# Altium PCB SIM7600_M_V2.1.1.PcbDoc
Units mm, origin at the board's own origin, x right, y up, seen from the top; angles counter-clockwise.
Board outline 149.61 x 116.74 mm, 4 copper layers (Top Layer, GND, PWR, Bottom Layer); 109 components, 93 nets, 423 pads, 113 vias.
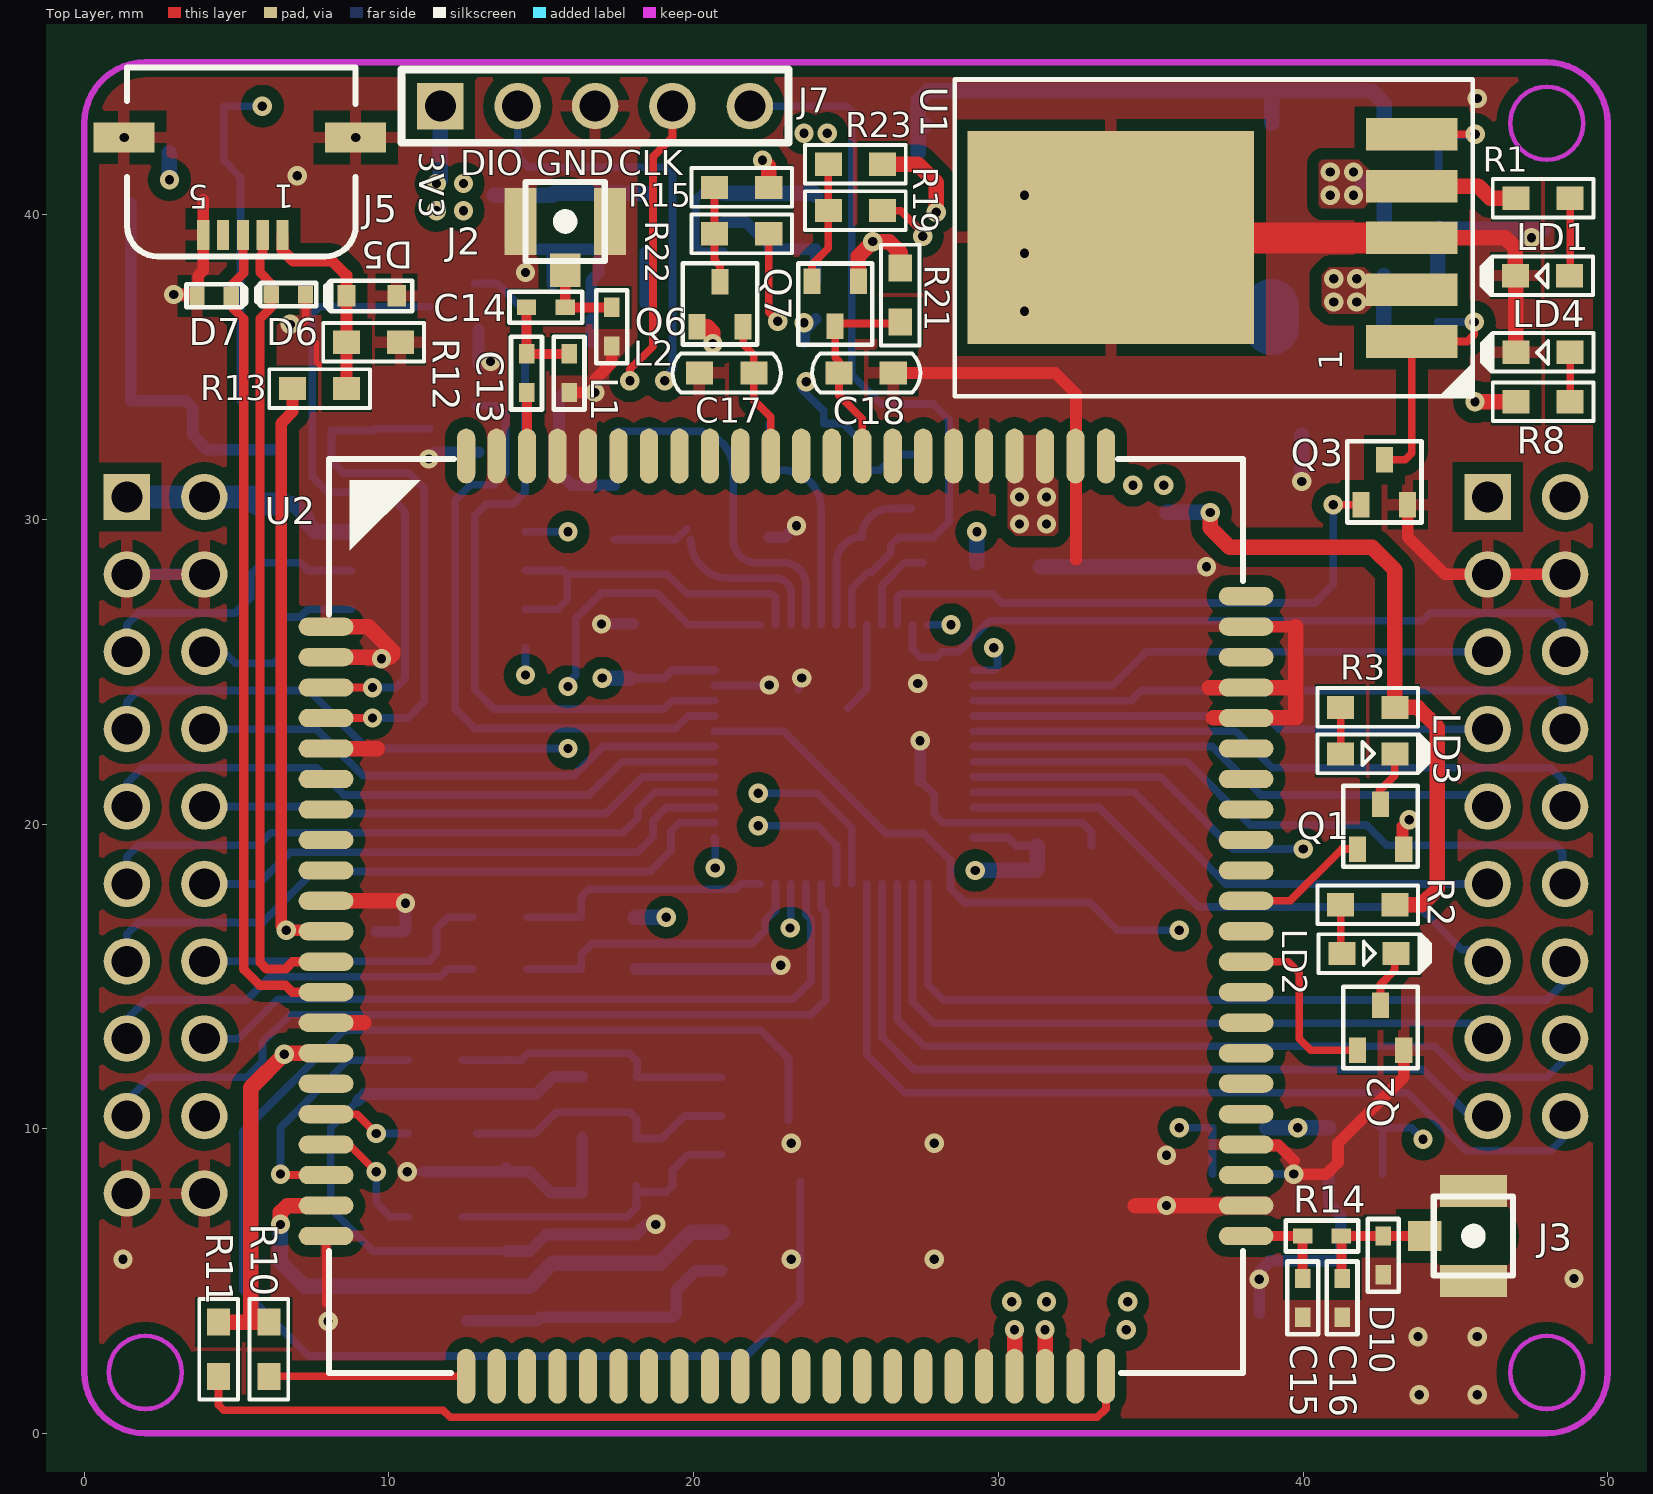
[diagram p0: Top Layer view]
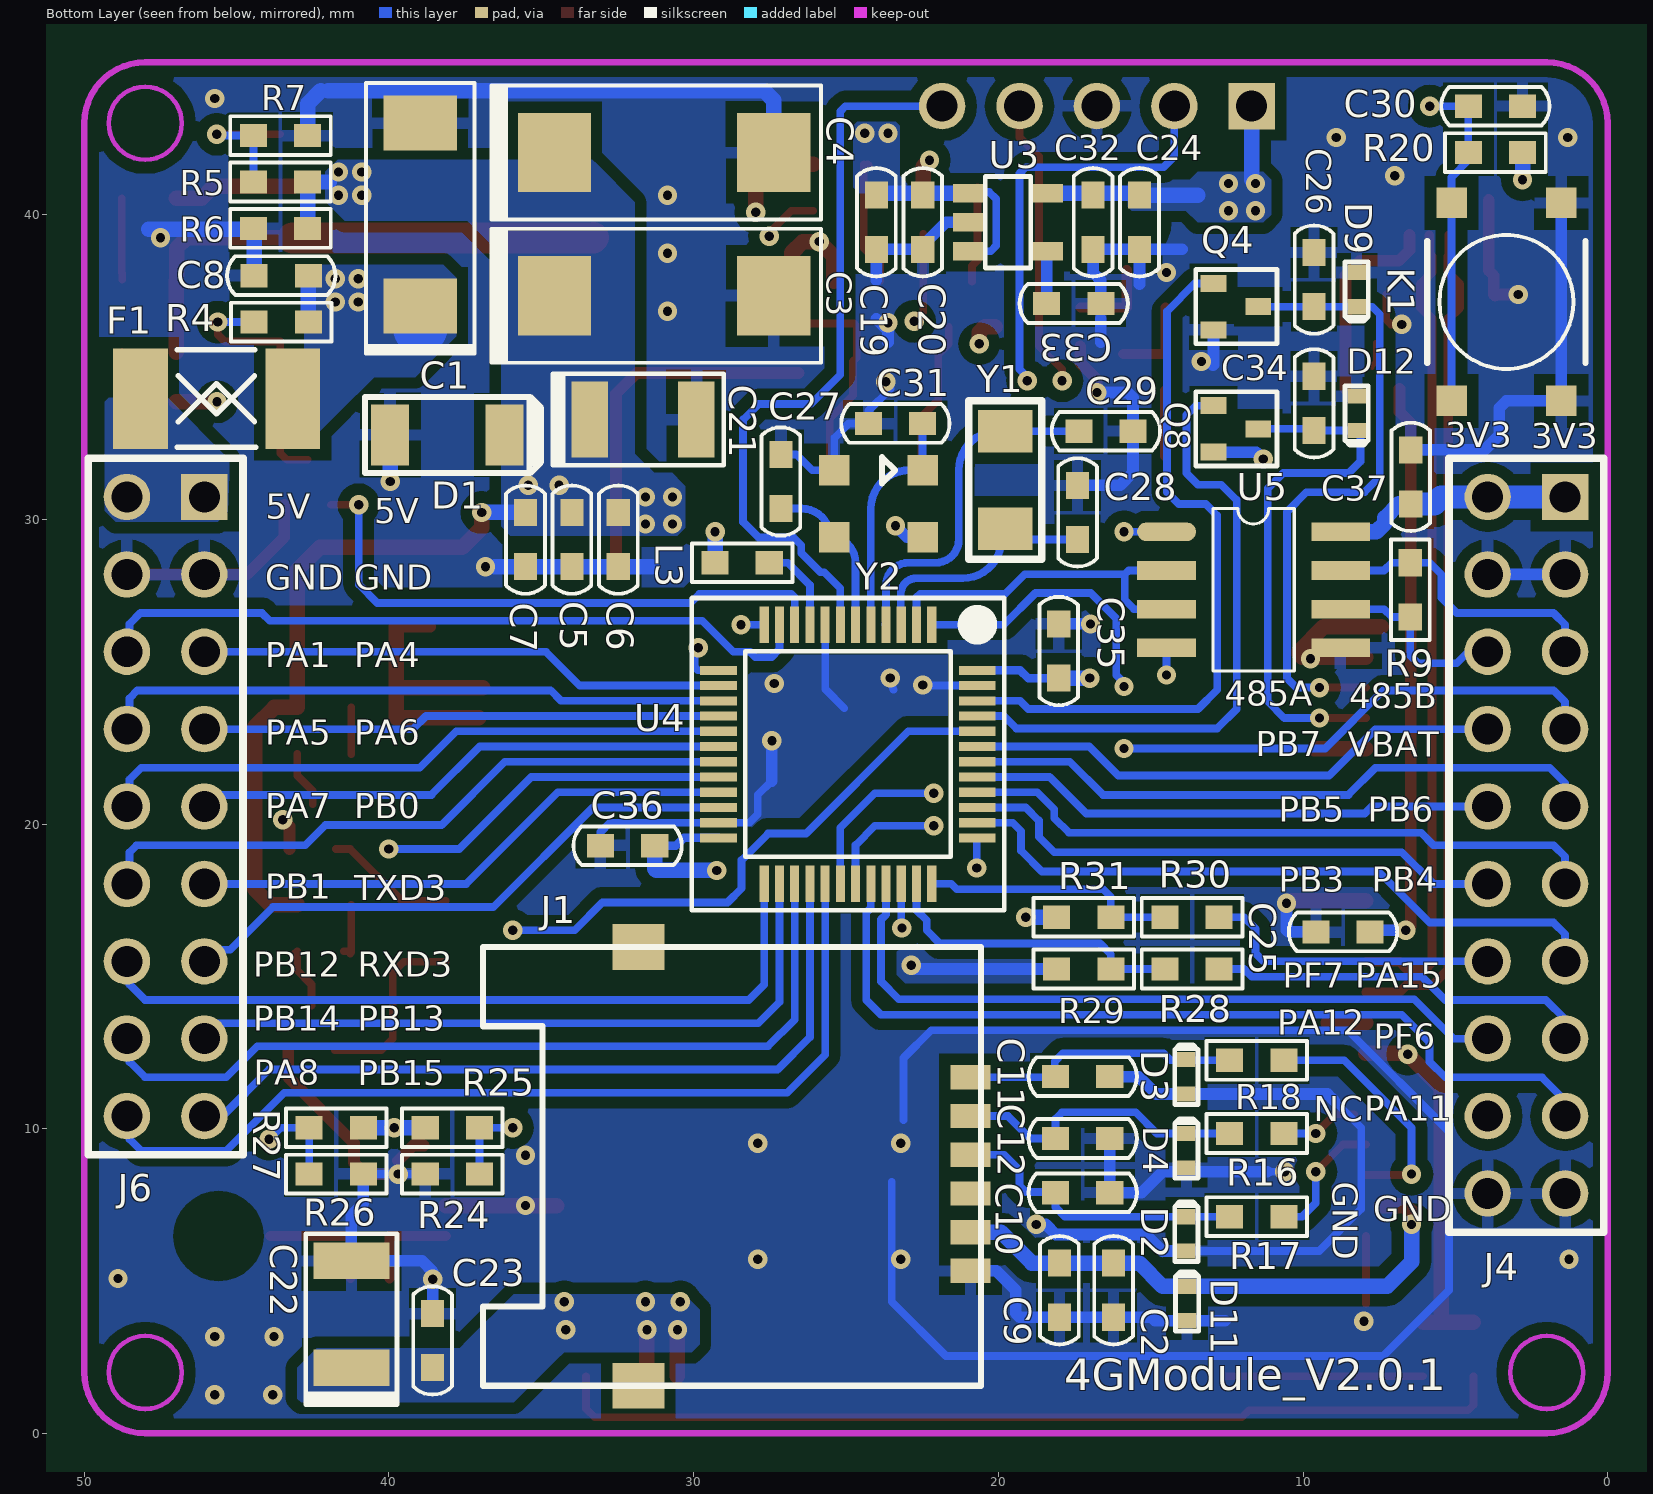
[diagram p1: Bottom Layer view, seen from below]
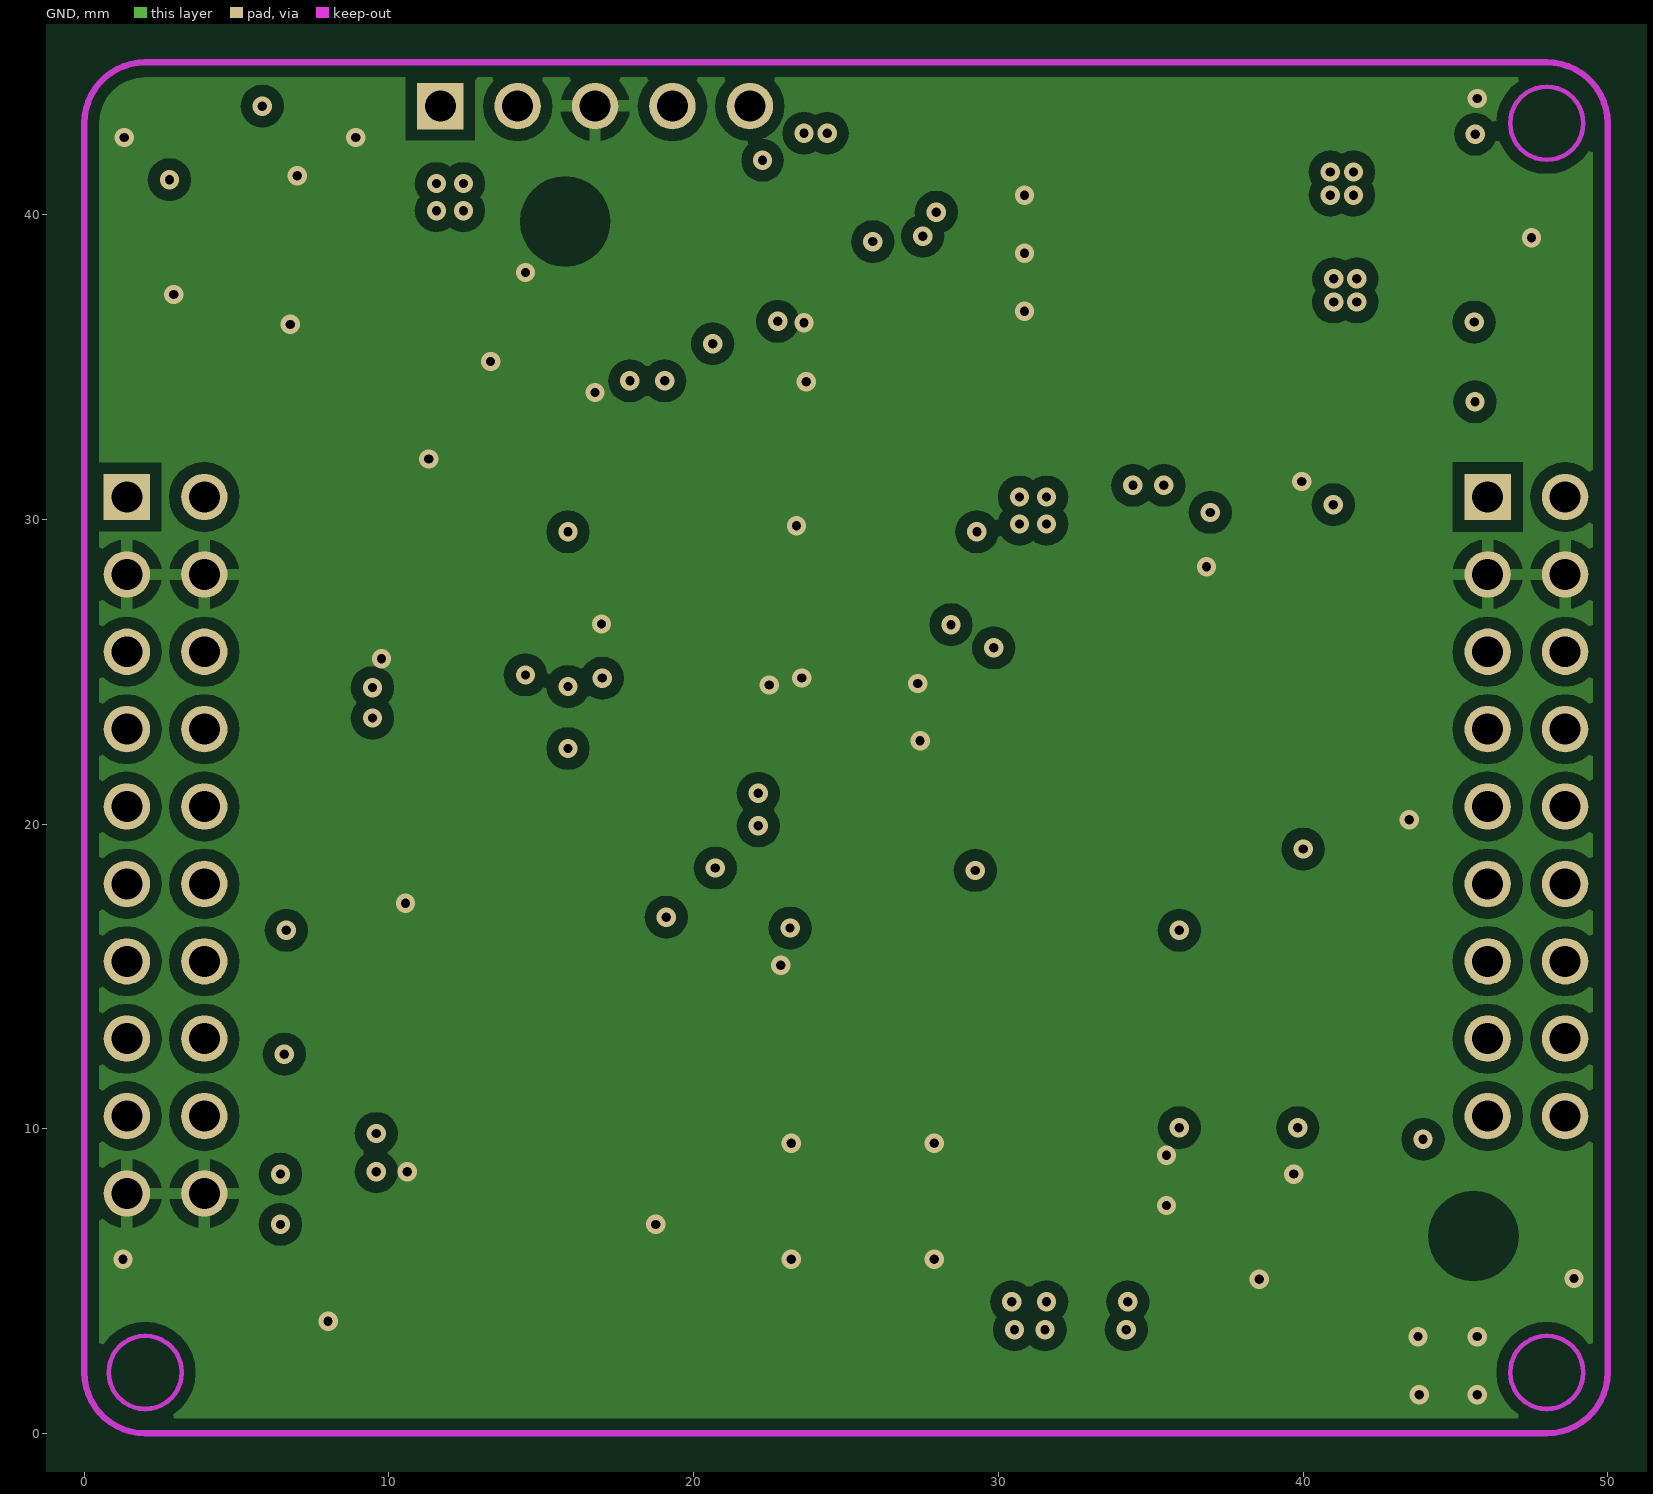
[diagram p2: GND]
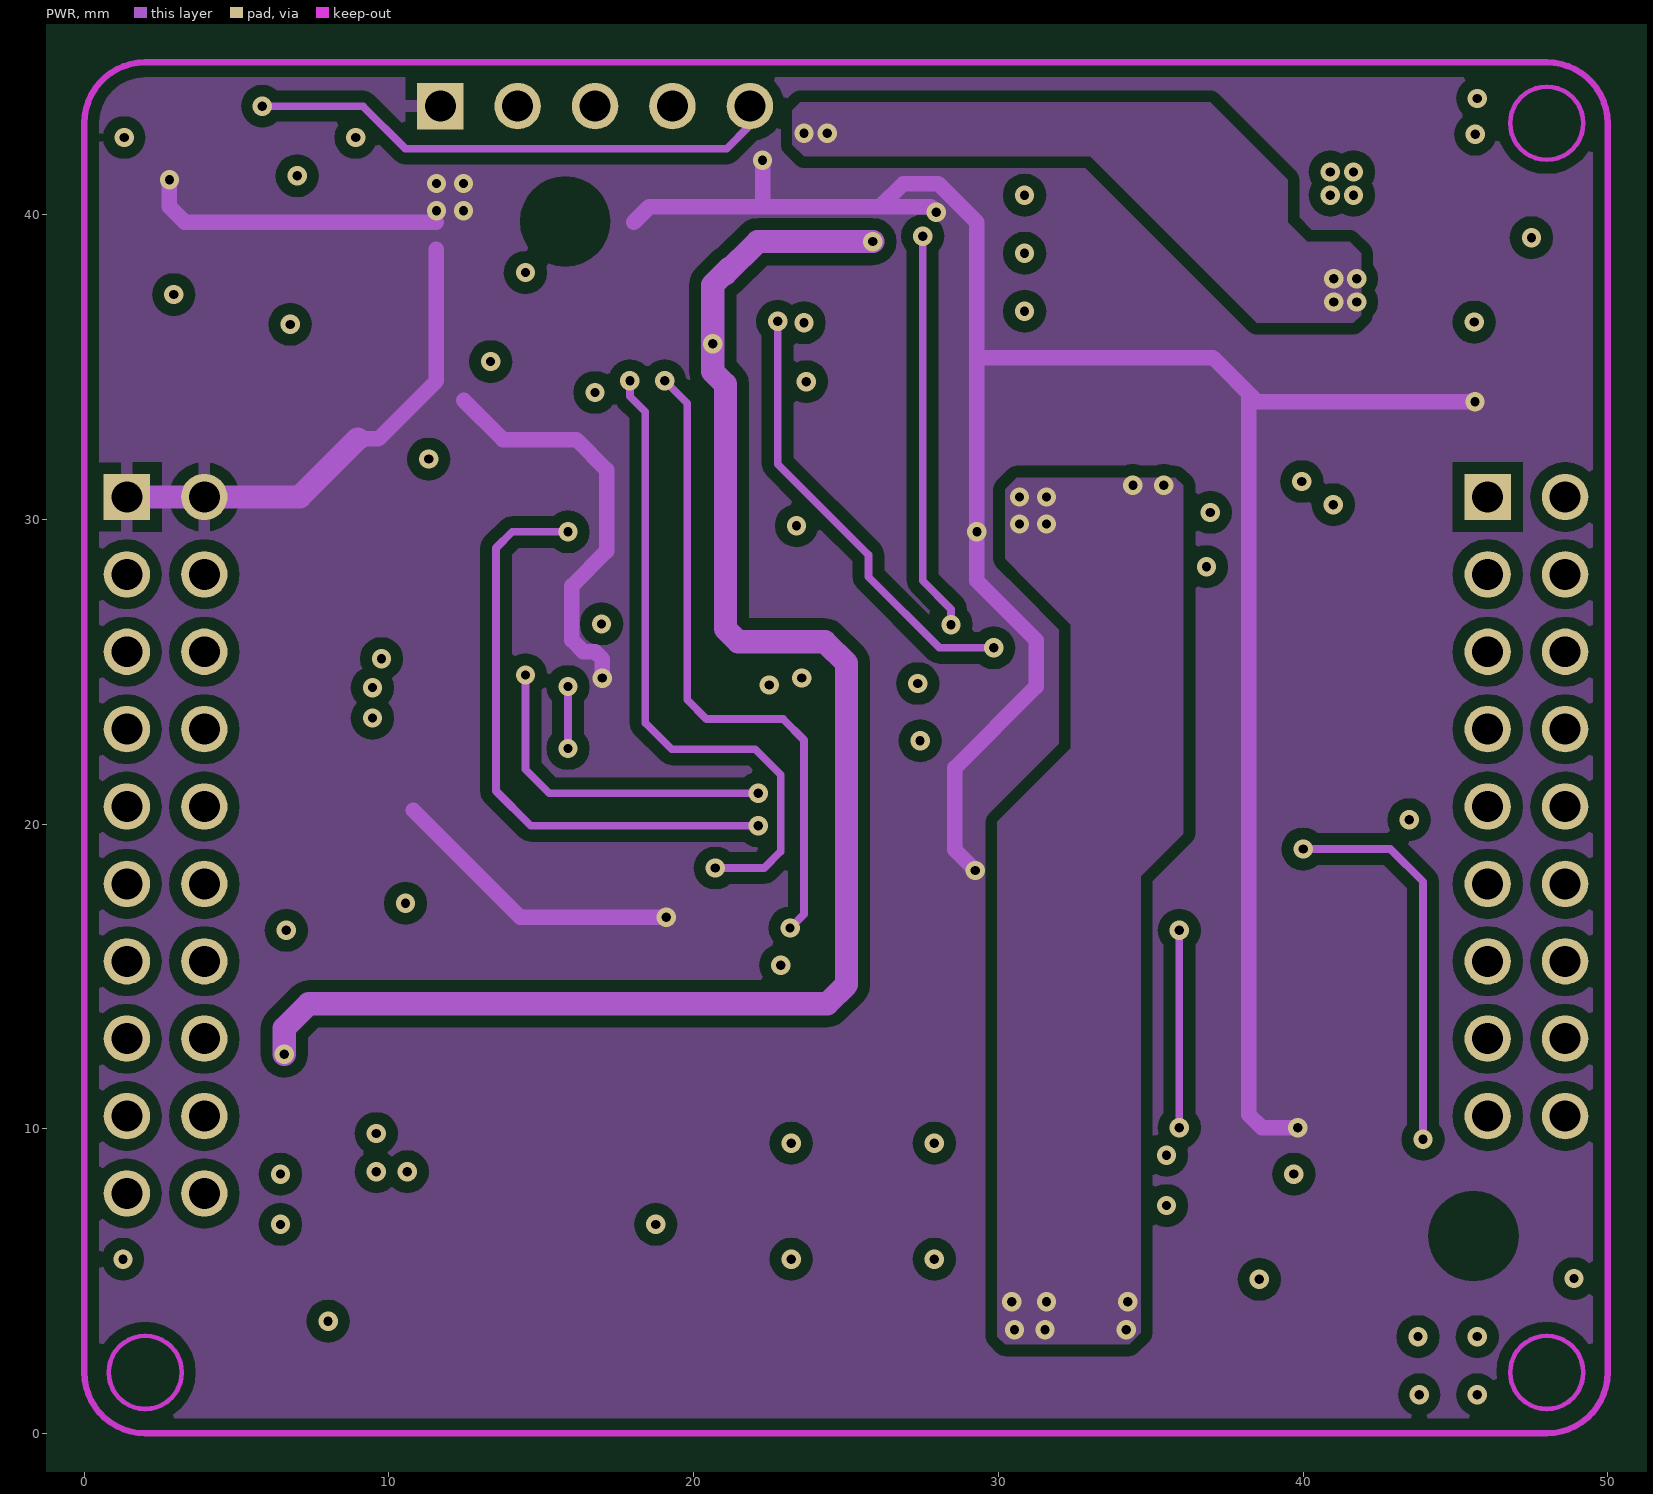
[diagram p3: PWR]

## Layer stack, top to bottom
Top Layer: signal copper 0.0356
Dielectric: core 0.32, FR-4, Dk 4.8
GND: signal copper 0.0356
Dielectric: prepreg 0.32, FR-4, Dk 4.8
PWR: signal copper 0.0356
Dielectric: core 0.32, FR-4, Dk 4.8
Bottom Layer: signal copper 0.0356

## Board outline
-41.8,72.578 -41.8,-38.903 -40.632,-40.071 101.354,-40.071 102.523,-38.903 107.806,-33.619 107.806,67.879 99.017,76.667 -35.349,76.667

## Design rules (kind name [scope] priority, off if disabled: settings)
Clearance [All] p1: gap=0.178
ComponentClearance [All] p1: gap=0.127 collisioncheckmode=2 verticalgap=0.254
DiffPairsRouting DiffPair_DiffPairsRouting [InDifferentialPair ('NewDifferentialPair1')] p1: maxlimit=2.54 minlimit=0.152 mostfreqgap=0.152 toplayer_mingap=0.229 toplayer_prefgap=0.229 midlayer1_mingap=0.229 midlayer1_prefgap=0.229 midlayer2_mingap=0.229 midlayer2_prefgap=0.229 bottomlayer_mingap=0.229 bottomlayer_prefgap=0.229 maxuncoupledlength=12.7
DiffPairsRouting [All] p2: maxlimit=2.54 minlimit=0.152 mostfreqgap=0.152 maxuncoupledlength=12.7
MatchedLengths DiffPair_MatchedLengths [InDifferentialPair ('NewDifferentialPair1')] p1: tolerance=25.4 checknetsindiffpair=TRUE checkdiffpairvsdiffpair=TRUE checkothers=TRUE
PlaneClearance [All] p1: clearance=0.15
PlaneConnect [All] p1: planeconnectstyle=Relief reliefexpansion=0.508 reliefentries=4 reliefconductorwidth=0.508 reliefairgap=0.254
PolygonConnect [All] p1: connectstyle=Relief reliefconductorwidth=0.381 reliefentries=4 polygonreliefangle="90 Angle"
RoutingCorners [All] p1: cornerstyle=Round minsetback=10 maxsetback=10
RoutingVias [All] p1: holewidth=0.711 width=1.27 viastyle="Through Hole" minholewidth=0.305 minwidth=0.635 maxholewidth=1.27 maxwidth=1.27
SolderMaskExpansion [All] p1: expansion=0.102
TestPointUsage [All] p1: valid=0 allowmultiple=FALSE
Testpoint [All] p1: side=15 testpointundercomponent=TRUE minsize=1.016 maxsize=2.54 preferedsize=1.524 minholesize=0 maxholesize=1.016 preferedholesize=0.813 testpointgrid=0.025 style=1021 order=0123456789
Width DiffPair_Width [InDifferentialPair('NewDifferentialPair1')] p1: maxlimit=0.381 minlimit=0.305 preferedwidth=0.381 toplayer_prefwidth=0.305 midlayer1_prefwidth=0.305 midlayer2_prefwidth=0.305 bottomlayer_prefwidth=0.305 minimp=50.000000 maximp=50.000000 favimp=50.000000
Width [All] p2: maxlimit=5.08 minlimit=0.152 preferedwidth=0.381 minimp=50.000000 maximp=50.000000 favimp=50.000000
14 further rules are at their usual default settings.

## Classes and differential pairs
component class U_03-4G: C2 C9 C10 C11 C12 C13 C14 C15 C16 C17 C18 C21 C22 C23 C25 C26 C34 D2 D3 D4 D5 D6 D7 D9 D10 D11 D12 J1 J2 J3 J5 L1 L2 LD2 LD3 Q1 Q2 Q4 Q6 Q7 Q8 Q22 Q111 R2 R3 R10 R11 R12 R13 R14 R15 R16 R17 R18 R19 R21 R22 R23 U2
component class U_01-POWER: C1 C3 C4 C5 C6 C7 C8 C19 C20 C24 C32 C33 D1 F1 LD1 LD4 Q3 R1 R4 R5 R6 R7 R8 U1 U3
component class U_02-MCU: C27 C28 C29 C30 C31 C35 C36 C37 J4 J6 J7 K1 L3 R9 R20 R24 R25 R26 R27 R28 R29 R30 R31 U4 U5 Y1 Y2
differential pair NewDifferentialPair1: +4G_USB_P -4G_USB_N

## Components (designator, comment, footprint, x,y, rotation, side; value= is the part's Value field where it differs from the comment)
C1 "100uF/16V" C_TAN_C 38.974,40.005 r90 bottom
C2 "33PF" 0603_C 16.216,5.588 r270 bottom
C3 "220uF/10V" C_TAN_D 30.973,37.338 r180 bottom
C4 "220uF/10V" C_TAN_D 30.973,42.037 r180 bottom
C5 "0.1uF" 0603_C 33.996,28.448 r90 bottom
C6 "2.2μF" 0603_C 32.472,28.448 r90 bottom
C7 "33PF" 0603_C 35.52,28.448 r90 bottom
C8 "0.1uF" 0603_C 44.425,37.998 r180 bottom
C9 "0.1uF" 0603_C 17.994,5.588 r270 bottom
C10 "33PF" 0603_C 16.343,7.899 r0 bottom
C11 "33PF" 0603_C 16.343,11.709 r0 bottom
C12 "33PF" 0603_C 16.343,9.677 r0 bottom
C13 "27PF" 0402 14.514,34.163 r90 top
C14 "27PF" 0402 14.514,36.957 r0 top
C15 "NC" 0402 39.987,3.81 r90 top
C16 "NC" 0402 41.283,3.81 r90 top
C17 "1NF" 0603_C 21.974,34.803 r180 top
C18 "100PF" 0603_C 26.551,34.803 r180 top
C19 "1uF" 0603_C 24.003,40.64 r270 bottom
C20 "0.1uF" 0603_C 22.479,40.64 r270 bottom
C21 "47uF/10V" C_TAN_B 33.412,33.274 r180 bottom
C22 "47uF/10V" C_TAN_B 41.235,2.159 r90 bottom
C23 "1uF" 0603_C 38.568,3.937 r270 bottom
C24 "1uF" 0603_C 15.367,40.64 r270 bottom
C25 "33PF" 0603_C 7.798,16.459 r0 bottom
C26 "0.1uF" 0603_C 9.636,38.759 r270 bottom
C27 "Cap" 0603_C 27.138,30.353 r90 bottom
C28 "Cap" 0603_C 17.399,29.337 r90 bottom
C29 "Cap" 0603_C 17.359,32.893 r180 bottom
C30 "Cap" 0603_C 2.794,43.561 r0 bottom
C31 "Cap" 0603_C 22.488,33.147 r0 bottom
C32 "0.1uF" 0603_C 16.891,40.64 r270 bottom
C33 "10nF" 0603_C 18.415,37.084 r180 bottom
C34 "0.1uF" 0603_C 9.636,34.695 r270 bottom
C35 "Cap" 0603_C 18.018,24.789 r90 bottom
C36 "Cap" 0603_C 31.278,19.289 r0 bottom
C37 "Cap" 0603_C 6.461,30.504 r90 bottom
D1 "BZV55C5V1" SOD-80 38.085,32.766 r180 bottom
D2 "ESD9M5.0ST5G" SOD-923 13.828,7.112 r270 bottom
D3 "ESD9M5.0ST5G" SOD-923 13.828,12.268 r270 bottom
D4 "ESD9M5.0ST5G" SOD-923 13.828,9.842 r270 bottom
D5 "PESD12VS1UB" SOD523 10.254,37.334 r0 top
D6 "ESD9L5.0ST5G" SOD-923 6.135,37.378 r0 top
D7 "ESD9L5.0ST5G" SOD-923 4.826,37.338 r180 top
D9 "ESD9M5.0ST5G" SOD-923 8.239,36.981 r90 bottom
D10 "LXES15AAA1-153" 0402 42.629,6.477 r270 top
D11 "ESD9M5.0ST5G" SOD-923 13.803,4.826 r270 bottom
D12 "ESD9M5.0ST5G" SOD-923 8.239,32.917 r90 bottom
F1 "Fuse 2A" 1812_F 48.158,33.96 r180 bottom
J1 "SIM_Card" MicroSIM-6 20.915,5.334 r90 bottom
J2 "CON2" RF-Z 15.784,39.776 r0 top
J3 "CON2" RF-Z 45.593,6.477 r270 top
J4 "Header2X10" DIP20-2.54-2.54 1.397,30.734 r270 bottom
J5 "USB" MICROUSB_SMD1 5.207,42.037 r180 top
J6 "HEADER2X9" DIP18-2.54-2.54 46.063,30.734 r270 bottom locked
J7 "XH2.54-5P" SIP5 11.684,43.561 r0 top
K1 "KEY" KEY_SMD5465 1.524,40.386 r270 bottom
L1 "NC" 0402 15.911,34.163 r90 top
L2 "NC" 0402 17.308,35.687 r90 top
L3 "Inductor" 0603_R 29.297,28.575 r180 bottom
LD1 "WHITE" LED_0603 48.752,37.997 r180 top
LD2 "WHITE" LED_0603 41.275,15.748 r0 top
LD3 "WHITE" LED_0603 41.235,22.301 r0 top
LD4 "WHITE" LED_0603 48.768,35.484 r180 top
Q1 "DTC143ZEBTL" SC-85 41.783,19.177 r0 top
Q2 "DTC143ZEBTL" SC-85 41.783,12.573 r0 top
Q3 "DTC143ZEBTL" SC-85 41.91,30.48 r0 top
Q4 "DTC143ZEBTL" SC-85 12.938,37.743 r270 bottom
Q6 "DTC143ZEBTL" SC-85 20.102,36.322 r0 top
Q7 "DTC143ZEBTL" SC-85 25.408,37.814 r180 top
Q8 "DTC143ZEBTL" SC-85 12.938,33.731 r270 bottom
R1 "1K" 0603_R 46.99,40.537 r0 top
R2 "1K" 0603_R 43.013,17.348 r180 top
R3 "1K" 0603_R 43.013,23.825 r180 top
R4 "47K" 0603_R 42.647,36.474 r0 bottom
R5 "100K" 0603_R 44.45,41.072 r180 bottom
R6 "750R" 0603_R 44.45,39.548 r180 bottom
R7 "47K" 0603_R 44.45,42.596 r180 bottom
R8 "1K" 0603_R 46.99,33.857 r0 top
R9 "100Ω" 0603_R 6.477,28.575 r270 bottom
R10 "NC" 0603_R 6.058,3.649 r270 top
R11 "NC" 0603_R 4.407,3.649 r270 top
R12 "47K" 0603_R 8.604,35.814 r0 top
R13 "0R" 0603_r 6.833,34.29 r0 top
R14 "0R" 0402 41.257,6.477 r180 top
R15 "10K" 0603_R 22.464,40.894 r180 top
R16 "22R" 0603_R 12.406,9.842 r180 bottom
R17 "22R" 0603_R 12.406,7.112 r180 bottom
R18 "22R" 0603_R 12.406,12.243 r180 bottom
R19 "0R" 0603_R 26.198,40.132 r180 top
R20 "Res3" 0603_R 4.572,42.037 r180 bottom
R21 "20K" 0603_R 26.781,38.251 r270 top
R22 "0R" 0603_R 22.464,39.37 r180 top
R23 "10K" 0603_R 24.42,41.656 r0 top
R24 "Res3" 0603_R 38.811,8.509 r180 bottom
R25 "Res3" 0603_R 37.033,10.033 r0 bottom (schematic designator 25)
R26 "Res3" 0603_R 40.843,8.509 r0 bottom
R27 "Res3" 0603_R 42.621,10.033 r180 bottom
R28 "Res3" 0603_R 12.751,15.24 r0 bottom
R29 "Res3" 0603_R 16.307,15.24 r0 bottom
R30 "Res3" 0603_R 12.751,16.942 r0 bottom
R31 "Res3" 0603_R 16.307,16.942 r0 bottom
U1 "MIC29302" TO-263-5 43.57,35.838 r90 top
U2 "SIM7600CE" SIM7600 7.933,26.477 r0 top locked
U3 "LD3985M33R" SOT23-5L 19.685,39.751 r270 bottom
U4 "STM32F103C8T6" LQFP48 22.185,26.543 r0 bottom
U5 "MAX3485ESA" SO8 14.478,29.591 r180 bottom
Y1 "32.768K" 3215 19.772,32.893 r270 bottom
Y2 "8MHz" CRY_S3225 24.09,30.607 r270 bottom

## Footprints (in the part's own frame and the unit in brackets; to place one, negate y for a bottom-side part, rotate by r counter-clockwise, add the part's x,y. Pads: shape width x height; smd on the part's side, far side on the other; paste and mask are expansions set on the pad)
0402 [mil]
  rect 25x20 smd: 1(0,0) 2(50,0)
  silkscreen extent -22,-20 72,20
0603_C [mil]
  rect 35x30 smd: 1(0,0) 2(70,0)
  silkscreen extent -35,-25 105,25, body extent 5,-15 65,15, height 39
0603_R [mil]
  rect 35x30 smd: 1(0,0) 2(70,0)
  silkscreen extent -30,-25 100,25, body extent 5,-15 65,15, height 39
0603_r [mil]
  rect 35x30 smd: 1(0,0) 2(70,0)
  silkscreen extent -30,-25 100,25, body extent 5,-15 65,15, height 39
1812_F [mm]
  rect 1.8x3.3 smd: 1(0,0) 2(5,0)
  silkscreen extent 1.2,-1.6 3.78,1.6
3215 [mm]
  rect 1.4x1.8 smd: 1(0,0)
  rect 1.4x1.8 smd paste+0: 2(3.2,0)
  silkscreen extent -1,-1.2 4.2,1.2
C_TAN_B [mm]
  rect 1.2x2.5 smd: 1(0,0) 2(3.5,0)
  silkscreen extent -1.22,-1.5 4.39,1.51, body extent 0,-1.5 3.5,1.5, height 2
C_TAN_C [mm]
  rect 1.8x2.4 smd: 1(-3,0) 2(3,0)
  silkscreen extent -4.57,-1.78 4.32,1.78, body extent -3,-1.78 3,1.78, height 2.6
C_TAN_D [mm]
  rect 2.4x2.6 smd: 1(-3.6,0) 2(3.6,0)
  silkscreen extent -5.67,-2.2 5.15,2.2, body extent -3.67,-2.2 3.53,2.2, height 4.3
CRY_S3225 [mm]
  rect 1x1 smd: 1(-1.005,1.602) 2(-1.005,-1.298) 3(1.195,-1.298) 4(1.195,1.602)
  silkscreen extent -1.44,0.27 -0.57,0.7, body extent -1.61,-1.9 1.8,2.2, height 1
DIP18-2.54-2.54 [mil]
  rect 60x60 hole 40: 1(0,0)
  round 60 hole 40: 2(0,-100) 3(100,0) 4(100,-100) 5(200,0) 6(200,-100) 7(300,0) 8(300,-100) 9(400,0) 10(400,-100) 11(500,0) 12(500,-100) 13(600,0) 14(600,-100) 15(700,0) 16(700,-100) 17(800,0) 18(800,-100)
  silkscreen extent -50,-150 850,50
DIP20-2.54-2.54 [mil]
  rect 60x60 hole 40: 1(0,0)
  round 60 hole 40: 2(0,-100) 3(100,0) 4(100,-100) 5(200,0) 6(200,-100) 7(300,0) 8(300,-100) 9(400,0) 10(400,-100) 11(500,0) 12(500,-100) 13(600,0) 14(600,-100) 15(700,0) 16(700,-100) 17(800,0) 18(800,-100) 19(900,0) 20(900,-100)
  silkscreen extent -50,-150 950,50
KEY_SMD5465 [mm]
  rect 1x1 smd: 1(0,0) 2(0,-3.6) 3(6.5,0) 4(6.5,-3.6)
  silkscreen extent 1.05,-4.4 5.45,0.8, body extent -0.25,-4.06 6.73,0.46, height 1.5
LED_0603 [mil]
  rect 35x30 smd: A(0,0) K(70,0)
  silkscreen extent -30,-25 114,25
LQFP48 [mm]
  rect 0.3x1.2 smd: 1(0,0) 2(0.5,0) 3(1,0) 4(1.5,0) 5(2,0) 6(2.5,0) 7(3,0) 8(3.5,0) 9(4,0) 10(4.5,0) 11(5,0) 12(5.5,0) 25(5.5,8.5) 26(5,8.5) 27(4.5,8.5) 28(4,8.5) 29(3.5,8.5) 30(3,8.5) 31(2.5,8.5) 32(2,8.5) 33(1.5,8.5) 34(1,8.5) 35(0.5,8.5) 36(0,8.5)
  rect 1.2x0.3 smd: 13(7,1.5) 14(7,2) 15(7,2.5) 16(7,3) 17(7,3.5) 18(7,4) 19(7,4.5) 20(7,5) 21(7,5.5) 22(7,6) 23(7,6.5) 24(7,7) 37(-1.5,7) 38(-1.5,6.5) 39(-1.5,6) 40(-1.5,5.5) 41(-1.5,5) 42(-1.5,4.5) 43(-1.5,4) 44(-1.5,3.5) 45(-1.5,3) 46(-1.5,2.5) 47(-1.5,2) 48(-1.5,1.5)
  silkscreen extent -2.38,-0.88 7.88,9.38
MicroSIM-6 [mm]
  rect 1.5x1.7 smd: 0(-3.77,10.9) 0(10.63,10.9)
  rect 0.8x1.3 smd: 1(1.27,0) 2(3.81,0) 3(6.35,0) 5(0,0) 6(2.54,0) 7(5.08,0)
  silkscreen extent -3.77,-0.35 10.63,16
MICROUSB_SMD1 [mm]
  rect 0.4x1 smd: 1(-1.299,2.705) 2(-0.649,2.705) 3(0.001,2.705) 4(0.651,2.705) 5(1.301,2.705)
  rect 2x1 smd: 6(-3.699,-0.495) 7(3.901,-0.495)
  silkscreen extent -3.7,-2.8 3.8,3.4
RF-Z [mm]
  rect 1x1.1 smd: 1(0,-1.6)
  rect 1.05x2.2 smd: 2(-1.475,0) 2(1.475,0)
  silkscreen extent -1.3,-1.3 1.3,1.3
SC-85 [mil]
  rect 22x33 smd: 1(0,0) 2(60,0) 3(30,58)
  silkscreen extent -18,-23 78,82
SIM7600 [mm]
  oval 1.8x0.6 smd: 1(0,0) 2(0,-1) 3(0,-2) 4(0,-3) 5(0,-4) 6(0,-5) 7(0,-6) 8(0,-7) 9(0,-8) 10(0,-9) 11(0,-10) 12(0,-11) 13(0,-12) 14(0,-13) 15(0,-14) 16(0,-15) 17(0,-16) 18(0,-17) 19(0,-18) 20(0,-19) 41(30.2,-19) 42(30.2,-18) 43(30.2,-17) 44(30.2,-16) 45(30.2,-15) 46(30.2,-14) 47(30.2,-13) 48(30.2,-12) 49(30.2,-11) 50(30.2,-10) 51(30.2,-9) 52(30.2,-8) 53(30.2,-7) 54(30.2,-6) 55(30.2,-5) 56(30.2,-4) 57(30.2,-3) 58(30.2,-2) 59(30.2,-1) 60(30.2,0) 81(0,-20) 82(30.2,-20) 85(30.2,1)
  oval 0.6x1.8 smd: 21(5.6,-24.6) 22(6.6,-24.6) 23(7.6,-24.6) 24(8.6,-24.6) 25(9.6,-24.6) 26(10.6,-24.6) 27(11.6,-24.6) 28(12.6,-24.6) 29(13.6,-24.6) 30(14.6,-24.6) 31(15.6,-24.6) 32(16.6,-24.6) 33(17.6,-24.6) 34(18.6,-24.6) 35(19.6,-24.6) 36(20.6,-24.6) 37(21.6,-24.6) 38(22.6,-24.6) 39(23.6,-24.6) 40(24.6,-24.6) 61(24.6,5.6) 62(23.6,5.6) 63(22.6,5.6) 64(21.6,5.6) 65(20.6,5.6) 66(19.6,5.6) 67(18.6,5.6) 68(17.6,5.6) 69(16.6,5.6) 70(15.6,5.6) 71(14.6,5.6) 73(12.6,5.6) 74(11.6,5.6) 75(10.6,5.6) 76(9.6,5.6) 77(8.6,5.6) 78(7.6,5.6) 79(6.6,5.6) 80(5.6,5.6) 83(25.6,-24.6) 84(4.6,-24.6) 86(4.6,5.6) 87(25.6,5.6)
  oval 0.6x1.8 smd paste+0: 72(13.6,5.6)
  silkscreen extent 0.1,-24.5 30.1,5.5
SIP5 [mil] "SIP5"
  rect 60x60 hole 40: 1(0,0)
  round 60 hole 40: 2(100,0) 3(200,0) 4(300,0) 5(400,0)
  silkscreen extent -50,-47 450,47
SO8 [mil]
  oval 76x24 smd: 1(0,0)
  rect 76x24 smd: 2(0,-50) 3(0,-100) 4(0,-150) 5(225,-150) 6(225,-100) 7(225,-50) 8(225,0)
  silkscreen extent 60,-180 165,30
SOD523 [mm]
  rect 0.6x0.7 smd: 1(0,0) 2(-1.65,0)
  silkscreen extent -2.34,-0.5 0.51,0.5
SOD-80 [mm]
  rect 1.25x2 smd: 1(-1.875,0) 2(1.875,0)
  silkscreen extent -2.7,-1.25 3.08,1.25
SOD-923 [mm]
  rect 0.5x0.6 smd: 1(1.129,0) 2(0,0)
  silkscreen extent -0.48,-0.38 1.47,0.38
SOT23-5L [mm]
  rect 0.6x1 smd: 1(-0.95,-1.3) 2(0,-1.3) 3(0.95,-1.3) 4(0.95,1.3) 5(-0.95,1.3)
  silkscreen extent -1.5,-0.75 1.5,0.75
TO-263-5 [mm]
  rect 1.07x3 smd: 1(0,0) 2(1.7,0) 3(3.4,0) 4(5.1,0) 5(6.8,0)
  rect 7x9.4 smd: 6(3.41,9.878)
  silkscreen extent -1.8,-2 8.6,15, body extent 0,0 6.8,12.6, height 4.5

## Part data
C1 C3 C4 C19 C21 C22 C33: library part ECAP, "E-CAP"
C2 C9 C10 C11 C12 C13 C14 C15 C16 C25: library part CAP, "CAP"
C5 C6 C7 C8 C17 C18 C23 C26 C34: library part "Cap Semi", "Capacitor"
C20 C24 C32: library part "Cap Semi_1", "Capacitor"
C27 C28 C29 C30 C31 C35 C36 C37: "Capacitor"
D1 D9 D11 D12: library part "DIODE SCHOTTKY"
D2 D3 D4 D5 D6 D7 D10: library part "DIODE TVS BI-DIR"
F1: library part "Fuse 1", "Fuse"
J5: library part USB-M
J7: library part "Header 5H", "Header, 5-Pin, Right Angle"
L1 L2: library part L
LD1 LD2 LD3 LD4: library part LED, "LED"
Q1 Q2 Q3 Q4: library part NPN
Q6 Q7 Q8: library part DTC143ZETL
R1 R2 R3 R6 R8 R9 R10 R11 R12 R13 R14 R15 R19 R21 R22 R23 R24 R25: library part RES1
R4 R5 R7 R16 R17 R18: library part R0.25W, "RESISTOR"
R20 R26 R27 R28 R29 R30 R31: "Resistor"
U2: library part L506
U3: library part AMS1117-3.3
U5: library part MAX485
Y1: library part XTAL, "Crystal Oscillator"
Y2: library part CRYSTAL_S4_1, "CRYSTAL_S4_PASSIVE"

## Via types
v1: diameter 0.635, hole 0.305, Top Layer to Bottom Layer, tented both sides, 113 vias

## Nets (pads, with @x,y where several pads share a name; then routed paths per layer and width w, separated by ;. In a path a pad name is that pad's centre, name@x,y a point inside that pad or via, vN(x,y) a via of type N, cw(c..) or ccw(c..) an arc to the next point about the centre after c; other vN are vias at no path point)
4G_MAIN_ANT: C15.2 R14.2 U2.82 | length 3.3
  Top Layer w0.33: U2.82 R14.2 C15.2
4G_NETLIGHT: Q1.1 U2.51 | length 4.3
  Top Layer w0.254: U2.51 39.573,17.477 41.273,19.177 Q1.1@41.743,19.177
4G_RESET: Q8.1 U4.45 | length 20.9
  Bottom Layer w0.254: Q8.1@12.811,33.731 13.521,33.731 13.827,33.425 13.827,31.52 13.446,31.139 12.684,31.139 12.176,30.631 12.176,23.773 12.811,23.138 19.415,23.138 19.82,23.543 U4.45
4G_STATUS: Q2.1 U2.49 | length 6.1
  Top Layer w0.254: U2.49 39.514,15.477 39.878,15.113 39.878,12.954 40.259,12.573 Q2.1
4G_USB_N: D6.2 J5.2 U2.12 | length 26.6
  Top Layer w0.305: J5.2 5.856,38.715 5.765,38.624 5.765,38.106 6.135,37.736 D6.2 6.135,36.954 5.765,36.584 5.765,15.458 5.979,15.244 6.601,15.244 6.834,15.477 U2.12
4G_USB_P: D7.2 J5.3 U2.13 | length 27.4
  Top Layer w0.305: J5.3 5.206,38.649 5.232,38.624 5.232,38.083 4.862,37.713 4.862,37.338 4.862,36.956 5.232,36.586 5.232,15.237 5.758,14.71 6.601,14.71 6.834,14.477 U2.13
4G_USB_VBUS: C25.1 R13.1 U2.11 | length 20.5
  Top Layer w0.381: v1(6.629,16.51) U2.11@7.864,16.51 ; v1@6.64,16.459 6.462,16.637 6.462,33.158 6.833,33.528 R13.1 ; U2.11@7.915,16.459 U2.11
  Bottom Layer w0.381: v1(6.629,16.51) 7.747,16.51 C25.1
485_A: J4.6 R9.2 U5.6 | length 6.5
  Bottom Layer w0.254: J4.6 4.572,25.654 4.953,25.273 6.223,25.273 6.477,25.527 R9.2 7.087,26.797 7.341,27.051 U5.6
485_B: J4.5 R9.1 U5.7 | length 9.6
  Bottom Layer w0.254: J4.5 1.397,26.543 1.778,26.924 4.953,26.924 5.461,27.432 5.461,28.194 5.842,28.575 7.087,28.575 7.341,28.321 U5.7
485_CTRL: U4.2 U5.2 U5.3 | length 11.8
  Bottom Layer w0.254: U5.3 15.545,27.051 15.85,27.356 15.85,28.194 ; U5.2 15.723,28.321 15.85,28.194 ; U4.2 22.685,27.44 22.566,27.559 19.772,27.559 19.137,28.194 15.85,28.194
+3.3V: C24.1 C32.1 C35.1 C36.1 C37.1 J4.1 J4.2 J7.1 L3.1 R8.1 R15.1 R20.2 R23.2 R25.2 R27.2 R31.2 U3.5 U4.24 U4.48 U5.8 | length 165.3
  Top Layer w0.508: v1(22.261,41.783) 22.464,41.58 R15.1 ; R23.2@26.071,41.656 27.356,41.656 27.965,41.046 v1(27.965,40.081) ; v1@45.645,33.857 R8.1
  PWR w0.508: v1(2.794,41.148) 2.794,40.259 3.302,39.751 11.557,39.751 ; 8.977,32.639 9.652,32.639 11.557,34.544 11.557,38.862 ; 10.789,20.453 14.3,16.942 v1(19.101,16.942) ; 12.446,33.909 13.741,32.614 16.154,32.614 17.145,31.623 17.145,28.956 16.002,27.813 16.002,26.035 16.383,25.654 16.764,25.654 17.002,25.416 v1(17.002,24.789) ; 18.034,39.751 18.542,40.259 27.788,40.259 v1(27.965,40.081) ; 22.225,40.259 22.261,40.295 v1(22.261,41.783) ; 26.122,40.259 26.884,41.021 28.027,41.021 29.297,39.751 29.297,27.98 31.242,26.035 31.242,24.511 28.575,21.844 28.575,19.147 v1(29.246,18.476) ; 29.297,35.306 37.044,35.306 38.492,33.858 v1(45.644,33.858) ; 38.227,34.123 38.227,10.452 38.646,10.033 v1(39.827,10.033)
  PWR w0.762: J4.1 7.072,30.734 8.977,32.639
  Bottom Layer w0.279: C35.1@17.907,24.789 19.026,24.789 19.28,25.043 U4.48 ; U4.24 30.328,19.543 30.582,19.289 C36.1
  Bottom Layer w0.508: v1(2.794,41.148) R20.2 ; C37.1 6.859,30.504 7.315,30.048 7.315,29.87 7.595,29.591 U5.8 ; v1@11.684,41.148 J7.1 ; 13.462,40.64 C24.1 ; C24.1@15.428,40.701 U3.5 ; v1(17.002,24.789) C35.1@17.907,24.789 ; R31.2 v1(19.101,16.942) ; v1(29.246,18.476) 31.227,18.476 31.278,18.527 C36.1 ; L3.1 v1(29.297,29.591) ; R25.2 R27.2
  Bottom Layer w0.762: J4.1 5.461,30.734 5.691,30.504 C37.1
  other v1: 11.557,40.132 12.446,40.132 11.557,41.021 12.446,41.021
+3.8V: C3.1 C4.1 C5.2 C6.2 C7.2 C21.1 C22.1 C23.2 D1.2 R1.1 R2.1 R3.1 R5.2 R6.2 U1.4 U2.38 U2.39 U2.62 U2.63 | length 30.9
  Top Layer w0.508: U2.38 v1(30.533,3.401) ; U2.39 v1(31.533,3.401) ; v1(36.957,30.226) 36.957,29.718 37.592,29.083 42.266,29.083 43.013,28.336 R3.1 43.764,23.825 44.41,23.179 44.41,17.867 43.891,17.348 R2.1 ; U1.4@43.164,40.938 45.752,40.938 46.153,40.537 R1.1
  Bottom Layer w0.508: C7.2 v1(36.957,30.226) ; 41.961,41.072 R5.2 R6.2
  other v1: 34.2,3.401 30.44,4.318 31.583,4.318 34.25,4.318 30.694,29.845 31.583,29.845 30.694,30.734 31.583,30.734 34.417,31.115 35.433,31.115 40.894,40.64 41.656,40.64 40.894,41.402 41.656,41.402
+5V: C1.1 C8.2 C19.1 C20.1 F1.2 R4.1 U1.2 U3.1 U3.3 | length 8.8
  Bottom Layer w0.254: U3.3 20.254,38.801 20.066,38.989 20.066,40.513 20.295,40.742 20.944,40.742 U3.1
  Bottom Layer w0.508: U3.1 23.942,40.701 C19.1 ; R4.1 C8.2
  Bottom Layer w1.778: C1.1@38.974,36.282 C1.1
  other v1: 41.006,37.135 41.768,37.135 41.006,37.897 41.768,37.897 23.622,42.672 24.384,42.672
BOOT0: R24.2 R25.1 U4.44 | length 27.6
  PWR w0.254: v1(35.94,10.033) v1(35.94,16.511)
  Bottom Layer w0.254: U4.44 22.957,23.043 26.314,19.686 27.557,19.686 28.427,18.815 28.427,17.888 28.891,17.424 32.995,17.424 33.908,16.511 v1(35.94,16.511) ; v1(35.94,10.033) R25.1 R24.2
BOOT1: R26.2 R27.1 U4.20 | length 27.7
  PWR w0.254: v1(40.004,19.178) 42.862,19.178 43.941,18.099 v1(43.941,9.653)
  Bottom Layer w0.254: U4.20 35.328,21.543 37.693,19.178 v1(40.004,19.178) ; R27.1@42.378,10.135 R27.1@42.418,10.095 ; R26.2 R27.1 43.561,10.033 v1(43.941,9.653)
COEX1: R11.2 U2.83 | length 31.4
  Top Layer w0.254: R11.2 4.407,0.927 4.572,0.762 11.771,0.762 12.008,0.525 33.251,0.525 33.533,0.807 U2.83
COEX2: R10.2 U2.84 | length 6.5
  Top Layer w0.254: R10.2@6.064,1.871 R10.2 6.064,1.877 U2.84
CTS: U2.67
DCD: U2.70
DTR: U2.72
GND: C1.2 C2.2 C3.2 C4.2 C5.1 C6.1 C7.1 C8.1 C9.2 C10.1 C11.1 C12.1 C15.1 C16.1 C17.2 C18.1 C19.2 C20.2 C21.2 C22.2 C23.1 C24.2 C25.2 C26.1 C27.2 C28.2 C29.2 C30.1 C31.2 C32.2 C33.2 C34.1 C35.2 C36.2 C37.2 D1.1 D2.1 D3.1 D4.1 D5.1 D6.1 D7.1 D9.1 D10.2 D11.1 D12.1 J1.5 J2.2 J3.2 J4.3 J4.4 J4.19 J4.20 J5.5 J5.6 J5.7 J6.3 J6.4 J7.3 K1.1 K1.3 L1.1 L2.1 LD1.K LD4.K Q1.2 Q2.2 Q3.2 Q4.2 Q8.2 R6.1 R7.2 R12.2 R24.1 R26.1 R29.2 U1.3 U1.6 U2.1 U2.2 U2.5 U2.10 U2.14 U2.37 U2.40 U2.41 U2.43 U2.57 U2.58 U2.60 U2.61 U2.64 U2.65 U2.77 U2.78 U2.80 U2.81 U3.2 U4.8 U4.23 U4.47 U5.5 Y2.2 Y2.4 | length 274.2
  Top Layer w0.152: 7.62,35.814 7.62,35.127 7.722,35.026 ; 7.722,34.975 7.722,35.103
  Top Layer w0.254: D7.1@3.697,37.378 D7.1@3.733,37.378 ; v1(6.756,36.398) 7.112,36.398 7.264,36.55 D6.1 ; 7.933,4.25 U2.81
  Top Layer w0.381: v1(2.936,37.378) D7.1@3.733,37.378 ; D7.1 3.733,37.374 3.733,37.992 3.906,38.165 3.906,40.482 ; L1.1 v1(16.764,34.163) 16.764,34.595 17.308,35.139 L2.1 ; C18.1 31.872,34.803 32.548,34.127 32.548,28.677 ; 37.037,23.477 37.051,23.477 ; U2.60@38.641,26.477 39.752,26.477 ; U2.43@38.862,9.449 39.203,9.449 39.703,8.948 ; v1(39.7,8.509) 40.767,8.509 41.148,8.89 41.148,9.525 43.307,11.684 Q2.2 ; Q1.2@43.267,19.177 43.267,19.924 v1(43.485,20.142) ; Q3.2 43.434,29.413 44.653,28.194 J6.4@48.514,28.194
  Top Layer w0.508: U2.1@7.425,26.477 9.319,26.477 10.12,25.676 ; U2.14 9.172,13.477 ; U2.10 10.463,17.477 v1(10.541,17.399) ; U2.5 9.623,22.477 ; U2.2 10.03,25.477 10.12,25.567 ; 34.488,7.477 U2.41 ; 36.926,24.477 39.55,24.477 ; 37.051,23.492 39.758,23.492 39.758,26.47 ; U1.3@43.164,39.238 46.639,39.238 46.974,38.903 LD1.K ; LD4.K LD1.K@46.99,37.854
  Top Layer w1.016: U1.6@33.286,39.248 33.297,39.238 U1.3@43.164,39.238
  Bottom Layer w0.254: 8.977,10.922 8.088,10.033 8.088,7.366 9.471,5.983 D2.1 ; v1(10.6,8.588) 11.176,8.588 ; C12.1 C12.1@16.343,9.779 ; U4.47 v1@22.471,24.543 ; 23.114,10.287 23.114,12.319 22.2,13.233 8.534,13.233 5.207,9.906 5.207,4.699 7.366,2.54 21.717,2.54 23.495,4.318 23.495,8.255 ; 23.444,24.409 v1(23.546,24.79) ; v1@23.531,34.29 24.266,33.555 C31.2 ; C31.2@24.344,33.147 24.909,33.147 25.388,32.667 Y2.2 26.111,31.612 26.63,32.131 C27.2 ; 25.055,23.8 25.685,24.43 U4.8 ; 27.443,21.412 27.9,20.955 27.9,20.32 28.177,20.043 32.749,20.043 33.056,19.736 C36.2 ; R24.1 R26.1
  Bottom Layer w0.381: J4.3 J4.4 ; K1.1 K1.3 3.325,33.886 3.556,33.655 3.556,32.766 4.04,32.282 C37.2 ; 8.977,10.922 9.195,11.14 14.823,11.14 15.392,11.709 C11.1 ; C25.2 10.49,16.459 10.541,16.51 v1(10.541,17.399) ; 11.176,8.588 14.613,8.588 15.302,7.899 C10.1 C12.1 ; v1(11.303,31.979) 11.532,32.207 Q8.2 ; 12.559,3.697 14.859,3.697 14.972,3.81 19.304,3.81 19.431,3.937 19.431,4.699 20.066,5.334 J1.5 ; Q4.2 12.938,35.068 12.954,35.052 ; D2.1 14.619,5.983 15.164,6.528 18.11,6.528 18.44,6.858 v1(18.756,6.858) ; D4.1 D4.1@13.954,8.588 ; 13.97,38.862 C32.2 16.891,38.1 16.637,37.846 C33.2 ; 15.367,37.719 C24.2 ; 16.637,35.814 16.637,36.576 ; v1(16.764,34.163) 15.748,34.163 15.581,33.996 C29.2 15.581,31.536 16.002,31.115 C28.2 ; v1(16.977,26.567) C35.2 ; R29.2 22.733,15.24 v1(22.86,15.367) ; U3.2 21.717,39.751 22.479,38.989 C20.2 C19.2 24.003,37.846 ; Y2.4 22.996,29.412 v1(23.377,29.793) ; 23.622,35.814 23.622,36.195 24.003,36.576 ; v1(27.432,22.733) 27.443,21.412 ; C23.1 v1(38.568,5.055) ; v1@38.568,5.309 38.918,5.659 C22.2 41.235,7.152 40.843,7.544 R26.1
  Bottom Layer w0.508: C4.2 27.373,43.756 27.686,44.069 41.986,44.069 ; C4.2@27.461,42.824 C4.2@27.588,42.951 ; 31.369,28.448 v1@36.536,28.448 ; C1.2 C1.2@38.974,43.732 ; v1(39.96,31.242) D1.1 ; 42.24,44.069 42.672,43.637 R7.2 ; C8.1 R6.1@44.425,39.522 ; R6.1 R6.1@44.425,39.522 ; 47.879,39.522 R6.1@44.425,39.522
  other v1: 43.815,1.27 45.72,1.27 43.775,3.175 45.72,3.175 8.001,3.683 48.895,5.08 1.27,5.715 23.201,5.715 27.9,5.715 35.52,7.477 35.52,9.128 23.201,9.525 27.9,9.525 22.479,24.562 27.356,24.613 9.754,25.425 36.83,28.448 23.698,34.519 13.335,35.179 23.622,36.449 30.861,36.83 14.478,38.1 30.861,38.735 47.498,39.243 30.861,40.64 6.985,41.275 1.306,42.532 8.906,42.532 45.72,43.815
GPS_ANT: C13.1 U2.79 | length 2.2
  Top Layer w0.152: C13.1@14.533,34.163 C13.1@14.533,34.222
  Top Layer w0.254: C13.1@14.533,34.222 C13.1@14.535,34.224
  Top Layer w0.33: U2.79 C13.1@14.533,34.222
NetC13_2: C13.2 C14.1 L1.2 | length 2.9
  Top Layer w0.33: C14.1 C13.2 L1.2
NetC14_2: C14.2 J2.1 L2.2 | length 2.7
  Top Layer w0.33: J2.1 C14.2 L2.2
NetC16_2: C16.2 D10.1 J3.1 R14.1 | length 4
  Top Layer w0.152: C16.2@41.257,5.105 C16.2
  Top Layer w0.33: C16.2@41.257,5.105 R14.1 J3.1@43.899,6.477
NetC26_2: C26.2 D9.2 Q4.3 U2.3 | length 21
  Top Layer w0.254: U2.3 v1(9.457,24.477)
  Bottom Layer w0.254: v1(9.457,24.477) 10.213,24.477 10.525,24.789 10.525,30.25 9.89,30.885 7.985,30.885 7.477,31.393 7.477,36.727 7.731,36.981 Q4.3@11.338,36.981
NetC33_1: C33.1 U3.4 | length 1.7
  Bottom Layer w0.254: U3.4 U3.4@18.415,38.771
  Bottom Layer w0.381: C33.1 U3.4@18.415,38.771
NetC34_2: C34.2 D12.2 Q8.3 U2.4 | length 18.1
  Top Layer w0.254: U2.4 v1(9.457,23.477)
  Bottom Layer w0.254: v1(9.457,23.477) 10.61,23.477 11.16,24.027 11.16,31.012 10.652,31.52 8.493,31.52 8.112,31.901 8.112,32.917 9.509,32.917 9.561,32.969 Q8.3@11.338,32.969
NetD5_2: D5.2 J5.1 R12.1 R13.2 | length 6.7
  Top Layer w0.381: J5.1 6.506,38.833 6.858,38.481 8.128,38.481 8.604,38.005 8.604,34.297 R13.2
NetL3_2: L3.2 U4.9 | length 2.9
  Bottom Layer w0.254: U4.9 26.185,27.845 26.915,28.575 L3.2
NetLD1_A: LD1.A R1.2 | length 2.7
  Top Layer w0.254: LD1.A@48.752,37.87 48.752,38.075 48.768,38.091 R1.2
NetLD2_A: LD2.A R2.2 | length 1.9
  Top Layer w0.254: LD2.A@41.235,15.824 LD2.A@41.489,15.824 ; R2.2 41.235,15.788 LD2.A
NetLD2_K: LD2.K Q2.3 | length 2.1
  Top Layer w0.254: Q2.3 42.545,14.732 43.013,15.2 43.013,15.824 LD2.K@43.089,15.748
NetLD3_A: LD3.A R3.2 | length 1.5
  Top Layer w0.254: LD3.A R3.2
NetLD3_K: LD3.K Q1.3 | length 1.9
  Top Layer w0.254: Q1.3@42.505,20.65 42.505,21.082 43.013,21.59 LD3.K
NetLD4_A: LD4.A R8.2 | length 1.6
  Top Layer w0.254: R8.2 LD4.A
NetQ3_3: Q3.3 R4.2 U1.1 | length 8.4
  Top Layer w0.254: Q3.3 43.358,31.953 43.57,32.166 U1.1 45.388,35.838 45.618,36.068 v1(45.618,36.474)
  Bottom Layer w0.254: R4.2 v1(45.618,36.474)
NetQ6_3: Q6.3 R15.2 R22.2 | length 3.2
  Top Layer w0.254: R15.2 20.686,38.496 20.864,38.318 Q6.3
NetQ7_2: Q7.2 R19.2 R23.1 | length 4.1
  Top Layer w0.254: Q7.2 23.884,38.362 24.42,38.898 R23.1 ; R23.1@24.265,41.628 R23.1@24.293,41.656
NetR5_1: R5.1 R7.1 U1.5 | length 5
  Top Layer w0.254: U1.5 v1(45.653,42.638)
  Bottom Layer w0.254: R5.1@44.407,41.148 R5.1@44.537,41.148 ; R5.1 R7.1 45.611,42.596 v1(45.653,42.638) ; v1@45.653,42.596 v1@45.662,42.596
NetR16_2: R16.2 U2.17 | length 2.6
  Top Layer w0.254: U2.17@8.314,10.477 8.949,10.477 v1(9.584,9.842)
  Bottom Layer w0.254: v1(9.584,9.842) R16.2
NetR17_2: R17.2 U2.18 | length 4.3
  Top Layer w0.254: U2.18 8.695,9.477 v1(9.584,8.588)
  Bottom Layer w0.254: v1(9.584,8.588) 9.584,7.561 10.033,7.112 R17.2
NetR18_2: R18.2 U2.19 | length 8.1
  Top Layer w0.254: v1@6.437,8.477 U2.19
  Bottom Layer w0.254: v1(6.437,8.509) 6.437,10.033 8.647,12.243 R18.2
NRST: C30.2 J7.5 K1.2 K1.4 R20.1 U4.7 | length 53.4
  PWR w0.254: v1(5.842,43.561) 9.144,43.561 10.541,42.164 21.082,42.164 21.844,42.926 J7.5
  Bottom Layer w0.254: K1.4 5.124,41.231 4.572,41.783 C30.2 v1(5.842,43.561) ; J7.5 25.019,43.561 25.193,43.387 25.193,34.751 26.162,33.782 27.87,33.782 28.378,33.274 28.378,29.911 27.87,29.403 26.727,29.403 26.473,29.149 26.473,28.895 25.838,28.26 25.711,28.26 25.185,27.734 U4.7
OSC32_IN: C28.1 U4.3 Y1.2 | length 7.9
  Bottom Layer w0.254: C28.1 19.416,29.337 Y1.2 ; Y1.2@19.899,29.337 ccw(c21.169,29.337) 21.169,28.067 22.693,28.067 cw(c22.693,27.559) 23.201,27.559 23.201,26.559 cw(c23.185,26.559) U4.3
OSC32_OUT: C29.1 U4.4 Y1.1 | length 11.7
  Bottom Layer w0.254: C29.1@17.486,32.893 Y1.1@20.28,32.893 ; Y1.1@20.026,32.893 cw(c20.026,31.623) 21.296,31.623 21.296,29.337 ccw(c22.058,29.337) 22.058,28.575 22.947,28.575 cw(c22.947,27.837) 23.685,27.837 U4.4 ccw(c23.685,26.567) U4.4@23.709,26.567
OSC_IN: C31.1 U4.5 Y2.1 | length 7.6
  Bottom Layer w0.254: Y2.1 C31.1 ; Y2.1@22.615,31.612 22.915,31.612 cw(c22.915,30.342) 23.544,31.445 cw(c22.915,30.342) 24.185,30.342 U4.5
OSC_OUT: C27.1 U4.6 Y2.3 | length 5.5
  Bottom Layer w0.254: U4.6 24.685,28.582 cw(c25.515,28.582) 25.515,29.412 cw(c26.456,29.412) 26.456,30.353 C27.1
PA1: J6.6 U4.11 | length 23.9
  Bottom Layer w0.254: U4.11 27.185,25.734 27.443,25.476 27.976,25.476 28.154,25.654 28.702,25.654 29.718,26.67 43.917,26.67 44.171,26.924 48.158,26.924 48.514,26.568 J6.6@48.514,25.654
PA4: J6.5 U4.14 | length 17.3
  Bottom Layer w0.254: U4.14 33.738,24.543 34.849,25.654 J6.5
PA5: J6.8 U4.15 | length 20.6
  Bottom Layer w0.254: U4.15 34.355,24.043 34.696,24.384 48.26,24.384 48.514,24.13 J6.8@48.514,23.114
PA6: J6.7 U4.16 | length 17.1
  Bottom Layer w0.254: U4.16 38.786,23.543 39.215,23.114 J6.7
PA7: J6.10 U4.17 | length 20.9
  Bottom Layer w0.254: U4.17 37.79,23.043 38.989,21.844 48.133,21.844 48.514,21.463 J6.10@48.514,20.574
PA8: J6.18 U4.29 | length 31.1
  Bottom Layer w0.254: U4.29 25.685,12.424 26.932,11.177 43.433,11.177 45.338,9.272 48.132,9.272 48.514,9.654 J6.18@48.514,10.795
PA11: J4.17 U4.32 | length 29.1
  Bottom Layer w0.254: J4.17 1.397,10.922 2.159,11.684 5.334,11.684 5.848,12.198 5.848,12.833 6.756,13.741 23.851,13.741 24.333,14.224 24.333,17.094 24.185,17.242 U4.32
PA12: J4.16 U4.33 | length 24
  Bottom Layer w0.254: J4.16 5.055,12.954 6.35,14.249 23.266,14.249 23.851,14.834 23.851,16.866 23.685,17.031 U4.33
PA15: J4.13 U4.38 | length 22.1
  Bottom Layer w0.254: J4.13 1.397,16.383 1.778,16.764 5.842,16.764 7.517,18.439 18.566,18.439 19.253,19.126 19.253,19.764 19.533,20.043 U4.38
PB0: J6.9 U4.18 | length 17.4
  Bottom Layer w0.254: U4.18 37.02,22.543 38.608,20.955 J6.9@45.974,20.955
PB1: J6.12 U4.19 | length 21.6
  Bottom Layer w0.254: U4.19 36.199,22.043 38.278,19.964 42.088,19.964 42.748,19.304 48.285,19.304 48.514,19.075 J6.12@48.514,18.034
PB3: J4.12 U4.39 | length 18.1
  Bottom Layer w0.254: J4.12 5.715,18.034 6.755,19.074 18.16,19.074 18.669,19.583 18.669,20.111 19.101,20.543 U4.39
PB4: J4.11 U4.40 | length 21.2
  Bottom Layer w0.254: J4.11 1.397,18.923 1.778,19.304 5.715,19.304 6.12,19.709 17.677,19.709 18.161,20.193 18.161,20.484 18.72,21.043 U4.40
PB5: J4.10 U4.41 | length 17.3
  Bottom Layer w0.254: J4.10 7.747,20.574 7.977,20.344 17.118,20.344 18.317,21.543 U4.41
PB6: J4.9 U4.42 | length 21.1
  Bottom Layer w0.254: J4.9 1.397,21.336 1.905,21.844 7.62,21.844 8.509,20.955 16.565,20.955 17.653,22.043 U4.42
PB7: J4.8 U4.43 | length 17.8
  Bottom Layer w0.254: J4.8 7.62,23.114 9.144,21.59 16.065,21.59 17.018,22.543 U4.43
PB12: J6.14 U4.25 | length 25.3
  Bottom Layer w0.254: U4.25 27.685,14.733 28.194,14.224 48.006,14.224 48.514,14.732 J6.14@48.514,15.494
PB13: J6.15 U4.26 | length 23.7
  Bottom Layer w0.254: U4.26 27.185,14.155 27.878,13.462 J6.15@45.974,13.462 ; 45.466,13.462 J6.15@45.974,12.954
PB14: J6.16 U4.27 | length 28.1
  Bottom Layer w0.254: U4.27 26.685,13.579 27.563,12.701 44.322,12.701 45.339,11.684 48.006,11.684 48.514,12.192 J6.16@48.514,12.954
PB15: J6.17 U4.28 | length 26
  Bottom Layer w0.254: U4.28 26.185,13.002 27.248,11.939 43.941,11.939 45.466,10.414 J6.17
PF6: J4.15 R28.1 | length 12.7
  Bottom Layer w0.254: J4.15 1.397,13.589 2.032,14.224 5.334,14.224 6.096,14.986 11.684,14.986 11.938,15.24 R28.1
PF7: J4.14 R30.1 | length 9.9
  Bottom Layer w0.254: J4.14 11.303,15.494 11.557,15.748 11.557,16.561 11.938,16.942 R30.1
PIN35: R28.2 R29.1 U4.35 | length 10.3
  Bottom Layer w0.254: R28.2 R29.1 ; R29.1@16.307,15.291 16.307,15.723 16.662,16.078 21.92,16.078 22.352,16.51 22.352,16.84 22.685,17.173 U4.35
PIN36: R30.2 R31.1 U4.36 | length 8.5
  Bottom Layer w0.254: R30.2 R31.1 16.307,17.602 16.561,17.856 21.361,17.856 21.548,18.043 U4.36
PWRKEY: Q4.1 U4.46 | length 23.9
  Bottom Layer w0.254: Q4.1@12.811,37.743 13.549,37.743 14.462,36.83 14.462,30.885 14.081,30.504 13.192,30.504 12.811,30.123 12.811,24.408 13.446,23.773 19.018,23.773 19.288,24.043 U4.46
PWRON: Q3.1 U4.10 | length 19.2
  Top Layer w0.254: v1(40.996,30.48) Q3.1
  Bottom Layer w0.254: U4.10 26.685,27.445 26.799,27.559 29.805,27.559 30.11,27.254 40.386,27.254 40.996,27.864 v1(40.996,30.48)
RI: U2.69
RTS: U2.66
RXD: C18.2 Q7.3 R21.2 U2.68 | length 7.2
  Top Layer w0.254: U2.68 25.533,33.304 24.773,34.064 24.773,35.179 24.646,35.306 Q7.3 24.736,36.431 R21.2@26.781,36.431 ; R21.2@26.666,36.442 R21.2@26.855,36.631 ; R21.2@26.691,36.341 R21.2@26.781,36.431 ; R21.2 R21.2@26.781,36.431
RXD2_MCU: U4.31 U5.1 | length 25.1
  PWR w0.254: v1(15.875,29.591) 14.046,29.591 13.513,29.058 13.513,21.082 14.656,19.939 v1(22.123,19.939)
  Bottom Layer w0.254: U5.1 v1(15.875,29.591) ; v1(22.123,19.939) 24.054,19.939 24.685,19.308 U4.31
RXD3_MCU: J6.13 U4.22 | length 18.7
  Bottom Layer w0.254: U4.22 33.305,20.543 36.575,17.273 43.814,17.273 45.212,15.875 J6.13@45.974,15.875
RXD_MCU: R22.1 U4.13 | length 19.2
  Top Layer w0.254: R22.1 22.464,36.794 v1(22.758,36.5)
  PWR w0.254: v1(22.758,36.5) 22.758,31.812 25.735,28.835 25.735,28.113 28.067,25.781 v1(29.845,25.781)
  Bottom Layer w0.254: U4.13 29.861,25.043 29.972,25.154 29.972,25.654 v1(29.845,25.781)
SIM_CLK: C11.2 D3.2 J1.3 R18.1 | length 9.3
  Bottom Layer w0.254: R18.1 14.351,12.243 14.58,12.471 17.882,12.471 18.146,12.207 C11.2@18.146,11.709 ; D3.2@13.803,12.243 D3.2 ; C11.2 18.146,11.684 J1.3
SIM_DATA: C12.2 D4.2 J1.7 R16.1 | length 9.4
  Bottom Layer w0.254: 12.886,9.842 14.795,9.842 15.494,10.541 17.907,10.541 18.121,10.327 C12.2 18.948,9.677 19.685,10.414 J1.7
SIM_RST: C10.2 D2.2 J1.2 R17.1 | length 10.1
  Bottom Layer w0.254: R17.1 17.816,7.112 18.121,7.417 C10.2@18.121,8.128 ; C10.2@18.121,7.925 19.101,7.925 19.304,8.128 19.304,8.636 19.812,9.144 J1.2
SIM_VDD: C2.1 C9.1 D11.2 J1.1 U2.20 | length 18.3
  Top Layer w0.508: v1(6.437,6.858) 6.437,7.251 6.663,7.477 U2.20@7.425,7.477
  Bottom Layer w0.508: v1(6.437,6.858) 6.437,5.628 7.239,4.826 14.605,4.826 15.367,5.588 18.898,5.588 19.914,6.604 J1.1
SWCLK: J7.4 U4.37 | length 32.1
  Top Layer w0.254: v1(17.907,34.544) 17.907,34.925 18.669,35.687 18.669,41.91 19.304,42.545 J7.4
  PWR w0.254: v1(17.907,34.544) 17.907,34.036 18.415,33.528 18.415,23.317 19.279,22.454 22.022,22.454 22.86,21.615 22.86,19.101 22.316,18.557 v1(20.71,18.557)
  Bottom Layer w0.254: v1@20.685,18.557 v1@20.71,18.531 ; U4.37@20.685,19.518 U4.37 20.71,19.518 v1(20.71,18.557)
SWDIO: J7.2 U4.34 | length 36.8
  PWR w0.254: v1(19.05,34.544) 19.787,33.807 19.787,24.079 20.422,23.444 22.936,23.444 23.622,22.758 23.622,17.041 v1(23.165,16.584)
  Bottom Layer w0.254: J7.2 14.224,41.91 14.58,41.554 19.101,41.554 19.304,41.351 19.304,34.925 19.05,34.671 v1(19.05,34.544) ; U4.34 23.185,16.742 v1@23.267,16.661
TXD: C17.1 Q6.2 U2.71 | length 4.6
  Top Layer w0.254: Q6.2 21.626,35.752 21.974,35.404 21.974,33.917 22.533,33.358 U2.71
TXD2_MCU: U4.30 U5.4 | length 17.3
  PWR w0.254: v1(14.478,24.892) 14.478,21.793 15.265,21.006 v1(22.123,21.006)
  Bottom Layer w0.254: v1(14.478,24.892) U5.4 ; v1(22.123,21.006) 24.054,21.006 25.185,19.875 U4.30
TXD3_MCU: J6.11 U4.21 | length 18
  Bottom Layer w0.254: U4.21 34.456,21.043 37.465,18.034 J6.11@45.974,18.034
TXD_MCU: R19.1 U4.12 | length 15.8
  Top Layer w0.254: R19.1@26.071,40.132 26.797,40.132 27.518,39.411 v1(27.518,39.294)
  PWR w0.254: v1(27.518,39.294) 27.518,27.981 28.447,27.052 v1(28.447,26.543)
  Bottom Layer w0.254: U4.12 v1(28.447,26.543)
VBAT: J4.7 U4.1 | length 27.5
  PWR w0.254: v1(15.875,22.479) v1(15.875,24.511)
  Bottom Layer w0.254: J4.7 1.397,24.003 1.778,24.384 7.366,24.384 9.271,22.479 v1(15.875,22.479) ; v1(15.875,24.511) 15.875,24.638 16.129,24.892 16.129,26.746 16.966,27.583 18.78,27.583 19.82,26.543 U4.1
VCC_5V: F1.1 J6.1 J6.2
VDD1V8: Q6.1 Q7.1 R10.1 R11.1 R21.1 U2.15 | length 68.6
  Top Layer w0.508: R11.1 R10.1 ; 5.461,3.776 5.461,11.343 v1(6.564,12.446) ; v1@6.595,12.477 U2.15 ; Q6.1 20.447,36.322 20.625,36.144 v1(20.625,35.763) ; Q7.1 25.408,38.642 v1(25.883,39.116) 26.416,39.116 26.781,38.751 R21.1
  PWR w0.762: v1(6.564,12.446) 6.564,13.295 7.366,14.097 24.384,14.097 25.019,14.732 25.019,25.273 24.308,25.984 21.463,25.984 21.042,26.405 21.042,34.432 20.625,34.849 20.625,37.694 21.184,38.252 ; 21.042,38.06 22.098,39.116 v1(25.883,39.116)
pads on no net: J1.0 J1.6 J4.18 J5.4 U2.6 U2.7 U2.8 U2.9 U2.16 U2.21 U2.22 U2.23 U2.24 U2.25 U2.26 U2.27 U2.28 U2.29 U2.30 U2.31 U2.32 U2.33 U2.34 U2.35 U2.36 U2.42 U2.44 U2.45 U2.46 U2.47 U2.48 U2.50 U2.52 U2.53 U2.54 U2.55 U2.56 U2.59 U2.73 U2.74 U2.75 U2.76 U2.85 U2.86 U2.87

## Polygon pours and split planes (outlines as drawn)
GND on Top Layer "Top Layer-No Net 2" (solid, remove dead copper, pour order 1000): -1.753,47.727 -1.753,1.346 2.489,-2.896 55.016,-2.896 56.007,-1.905 56.007,43.155 49.2,49.962
GND on Top Layer "Top Layer-No Net" (solid, remove dead copper, pour order 1000): 34.433,7.772 38.926,7.772 40.412,10.02 40.777,10.573 49.095,10.573 49.095,9.796 49.292,9.497 49.292,1.344 49.154,1.135 49.095,1.045 49.095,0.208 49.095,0.052 48.774,-0.433 45.353,-0.433 43.971,-2.523 43.729,-2.889 39.409,-2.889 39.168,-2.889 37.716,-0.694
GND on Top Layer "Top Layer-No Net 8" (solid, remove dead copper, pour order 1003): 12.881,41.544 18.215,41.544 18.841,40.918 18.841,35.182 17.094,33.435 16.815,33.156 16.815,31.632 16.815,31.026 16.503,30.714 16.31,30.521 16.31,28.793 16.31,28.736 16.503,28.543 16.503,28.195 16.332,28.025 12.649,28.025 12.497,28.177 12.497,28.537 12.503,28.543 12.776,28.816 12.776,30.336 12.776,30.469 12.531,30.714 12.531,41.195 12.754,41.417
+3.8V on Top Layer "Top Layer-No Net 3" (solid, remove dead copper, pour order 1000): 30.313,32.766 30.313,29.718 30.44,29.591 30.567,29.464 31.837,29.464 31.964,29.591 31.964,30.734 31.964,31.242 31.583,31.623 31.583,32.766
+3.8V on Top Layer "PWR-No Net 2" (solid, remove dead copper, pour order 1000): 43.434,41.402 42.418,41.402 42.24,41.402 41.885,41.758 41.834,41.808 40.615,41.808 40.513,41.707 40.513,41.504 40.513,40.31 40.615,40.208 41.986,40.208 42.215,40.437 42.342,40.564 43.383,40.564
+5V on Top Layer "Top Layer-No Net 1" (solid, remove dead copper, pour order 1001): 40.869,38.278 40.615,38.024 40.615,37.033 40.615,37.008 40.869,36.754 42.012,36.754 42.316,37.059 42.316,37.973 42.012,38.278
+5V on PWR "PWR-No Net 4" (solid, remove dead copper, pour order 1002): 23.241,43.18 23.241,43.434 23.495,43.688 36.957,43.688 39.497,41.148 39.497,39.751 40.132,39.116 41.529,39.116 41.91,38.735 41.91,36.703 41.656,36.449 38.481,36.449 37.592,37.338 33.02,41.91 23.876,41.91 23.622,41.91 23.241,42.291
+3.8V on PWR "PWR-No Net 1" (solid, remove dead copper, pour order 1003): 30.607,31.369 30.226,30.988 30.226,28.702 30.988,27.94 32.385,26.543 32.385,24.511 32.385,22.479 29.972,20.066 29.972,3.175 30.226,2.921 34.29,2.921 34.671,3.302 34.671,18.288 36.068,19.685 36.068,31.115 35.814,31.369
+3.3V on PWR "PWR-No Net 3" (solid, remove dead copper, pour order 1004): -0.127,47.117 47.625,47.117 51.689,43.053 51.689,-2.032 51.435,-2.286 0.508,-2.286 -4.826,3.048 -4.826,43.307 -3.175,44.958
GND on GND "GND-No Net" (solid, remove dead copper, pour order 1005): -1.27,46.355 50.292,46.355 52.324,44.323 52.324,-0.508 49.149,-3.683 -0.762,-3.683 -4.953,0.508 -3.175,2.286 -3.175,44.831
GND on Bottom Layer "Bottom Layer-No Net 6" (solid, remove dead copper, pour order 1001): -0.33,46.609 -1.981,44.958 -1.981,-0.356 -0.762,-1.575 51.791,-1.575 51.791,46.152 51.181,46.761 1.016,46.761 0.965,46.711
+3.8V on Bottom Layer "PWR-No Net" (solid, pour order 1005): 40.854,2.794 42.378,2.794 43.013,2.159 43.013,1.143 42.886,1.016 35.901,1.016 34.504,2.413 34.25,2.667 30.059,2.667 29.805,2.921 29.805,3.81 29.805,4.064 30.313,4.572 35.901,4.572 37.425,3.048 37.679,2.794 42.378,2.794
+5V on Bottom Layer "Bottom Layer-No Net" (solid, remove dead copper, pour order 1006): 37.795,37.922 37.795,36.017 38.786,35.027 39.141,34.671 40.31,34.671 40.488,34.671 41.681,33.477 42.418,32.741 43.028,32.741 42.774,32.995 42.774,36.982 42.774,37.922 42.342,38.354 38.227,38.354 37.795,37.922
VCC_5V on Bottom Layer "Bottom Layer-No Net 2" (solid, remove dead copper, pour order 1007): 45.237,31.471 45.237,31.953 47.269,33.985 49.2,33.985 49.327,33.858 49.327,30.277 48.971,29.921 45.618,29.921 45.288,30.251
+3.3V on Bottom Layer "Bottom Layer-No Net 4" (solid, remove dead copper, pour order 1008): 11.303,41.402 11.049,41.148 11.049,40.005 11.303,39.751 13.462,39.751 13.843,40.132 15.367,40.132 15.621,40.132 15.748,40.259 15.748,41.021 15.621,41.148 13.716,41.148 13.462,41.402
+3.8V on Bottom Layer "Bottom Layer-No Net 5" (solid, remove dead copper, pour order 1009): 41.326,41.808 41.529,41.605 41.529,40.513 41.529,40.437 41.326,40.234 40.894,39.802 38.024,39.802 37.44,39.802 36.449,38.811 36.322,38.684 36.322,29.769 36.017,29.464 30.531,29.464 30.277,29.718 30.277,29.769 30.277,31.09 30.353,31.166 30.709,31.521 31.115,31.521 31.293,31.521 31.928,32.156 31.928,40.411 33.172,41.656 33.325,41.808 41.326,41.808
+3.8V on Bottom Layer "Bottom Layer-No Net 1" (solid, remove dead copper, pour order 1010): 41.326,41.808 41.681,41.808 42.088,41.402 42.088,40.437 41.529,39.878 41.453,39.802 40.894,39.802 40.843,39.802 40.386,40.259
+5V on Bottom Layer "Bottom Layer-No Net 3" (solid, remove dead copper, pour order 1011): 23.368,43.053 23.241,42.926 23.241,42.799 23.241,41.275 22.987,41.021 22.987,40.828 23.114,40.701 24.572,40.701 24.765,40.894 24.765,42.926 24.638,43.053

## Keep-outs
Keep-Out Layer:
  circle w0.152: c2,2 r1.2
  circle w0.152: c48,43 r1.2
  circle w0.152: c48,2 r1.2
  lines w0.203: 0,2 ccw(c2,2) 2,0 48,0 ccw(c48,2) 50,2 50,43 ccw(c48,43) 48,45 2,45 ccw(c2,43) 0,43 0,2

## Silkscreen, mask and mechanical layers (free items; w line width, h text height)
Top Overlay:
  text "3V3" at 10.998,42.062 h0.81 r270
  text "DIO" at 12.344,41.3 h0.81
  text "GND" at 14.834,41.3 h0.81
  text "CLK" at 17.526,41.3 h0.81
Bottom Overlay:
  text "3V3" at 5.334,32.36 h0.81
  text "3V3" at 2.515,32.334 h0.81
  text "5V" at 44.044,30.023 h0.81
  text "5V" at 40.478,29.874 h0.81
  text "GND" at 41.148,27.686 h0.81
  text "GND" at 44.069,27.686 h0.81
  text "PA4" at 41.148,25.146 h0.81
  text "PA1" at 44.069,25.146 h0.81
  text "485A" at 12.573,23.876 h0.81
  text "485B" at 8.484,23.8 h0.81
  text "PA6" at 41.148,22.606 h0.81
  text "PA5" at 44.069,22.606 h0.81
  text "PB7" at 11.557,22.225 h0.81
  text "VBAT" at 8.529,22.205 h0.81
  text "PB0" at 41.148,20.193 h0.81
  text "PA7" at 44.069,20.193 h0.81
  text "PB6" at 7.874,20.066 h0.81
  text "PB5" at 10.795,20.066 h0.81
  text "PB4" at 7.747,17.78 h0.81
  text "PB3" at 10.795,17.78 h0.81
  text "PB1" at 44.069,17.551 h0.81
  text "TXD3" at 41.148,17.501 h0.81
  text "RXD3" at 41.021,14.986 h0.81
  text "PB12" at 44.45,14.986 h0.81
  text "PA15" at 8.28,14.63 h0.81
  text "PF7" at 10.668,14.63 h0.81
  text "PB13" at 41.021,13.208 h0.81
  text "PB14" at 44.45,13.208 h0.81
  text "PA12" at 10.846,13.081 h0.81
  text "PF6" at 7.671,12.624 h0.81
  text "PA8" at 44.434,11.446 h0.81
  text "PB15" at 41.021,11.43 h0.81
  text "PA11" at 7.986,10.262 h0.81
  text "NC" at 9.652,10.236 h0.81
  text "GND" at 9.017,8.255 h0.81 r90
  text "GND" at 7.696,6.96 h0.81
  text "4GModule_V2.0.1" at 17.831,1.067 h1.78
Mechanical 1:
  circle w0.152: c48,2 r1.2
  circle w0.152: c2,2 r1.2
  circle w0.152: c48,43 r1.2
  lines w0.203: 50,43 50,2 cw(c48,2) 48,0 2,0 cw(c2,2) 0,2 0,43 cw(c2,43) 2,45 48,45 cw(c48,43) 50,43.034

## Text inside footprints (layer, text, board x,y; h text height)
J5: Top Overlay "1" at 6.883,40.988 h0.76 r180; Top Overlay "5" at 4.064,40.963 h0.76 r180
U1: Top Overlay "1" at 41.291,34.886 h0.76 r90